# Altium PCB TempeMax.PcbDoc
Units mil, origin at the board's own origin, x right, y up, seen from the top; angles counter-clockwise.
Board outline 2770 x 2630 mil, 3 copper layers (Top Layer, Mid-Layer 1, Bottom Layer); 85 components, 63 nets, 284 pads, 170 vias.
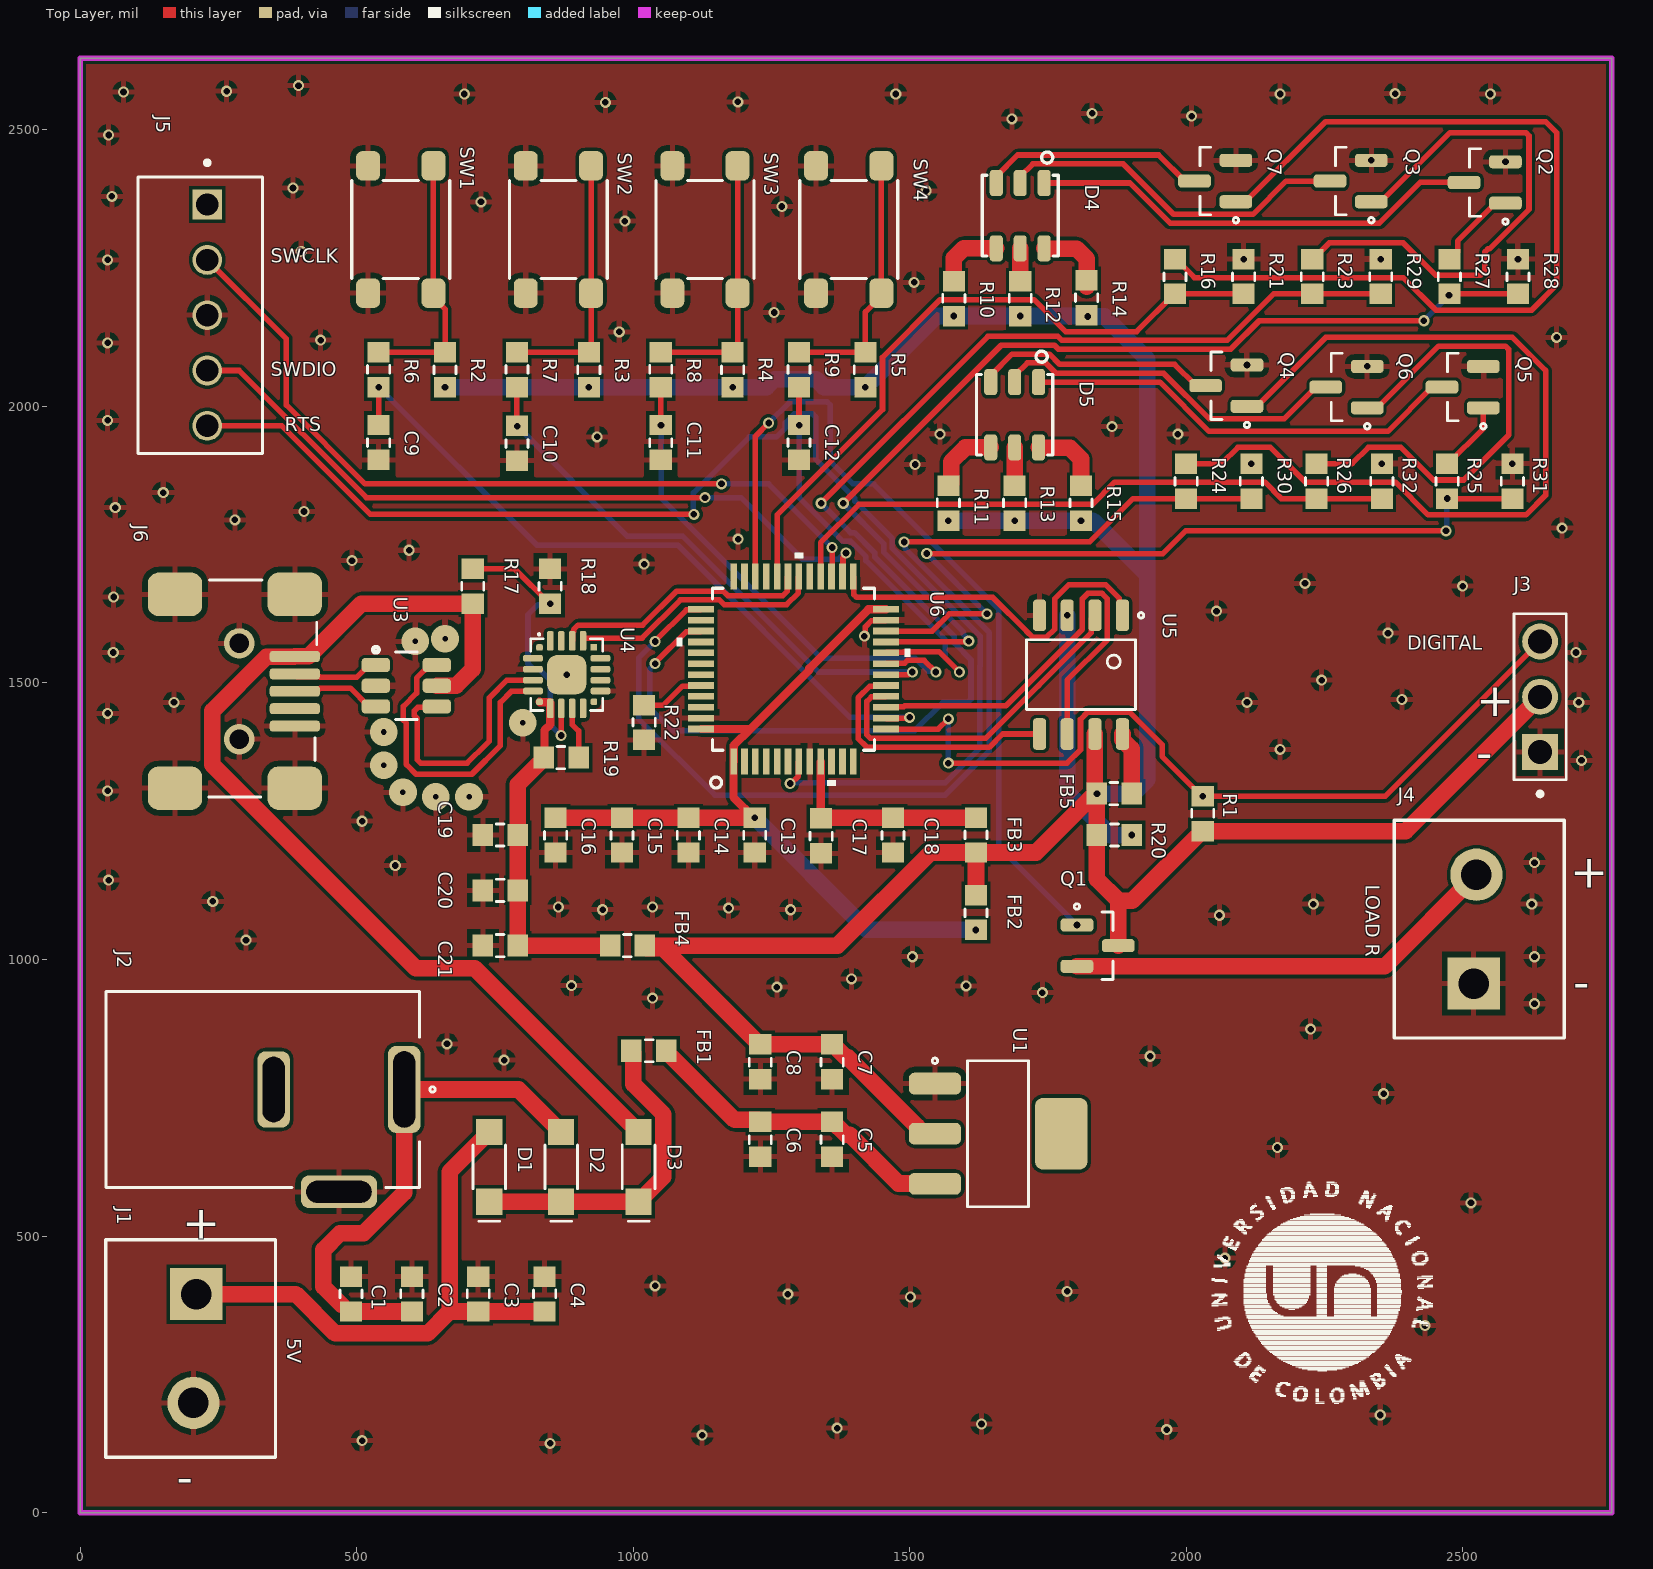
[diagram p0: Top Layer view]
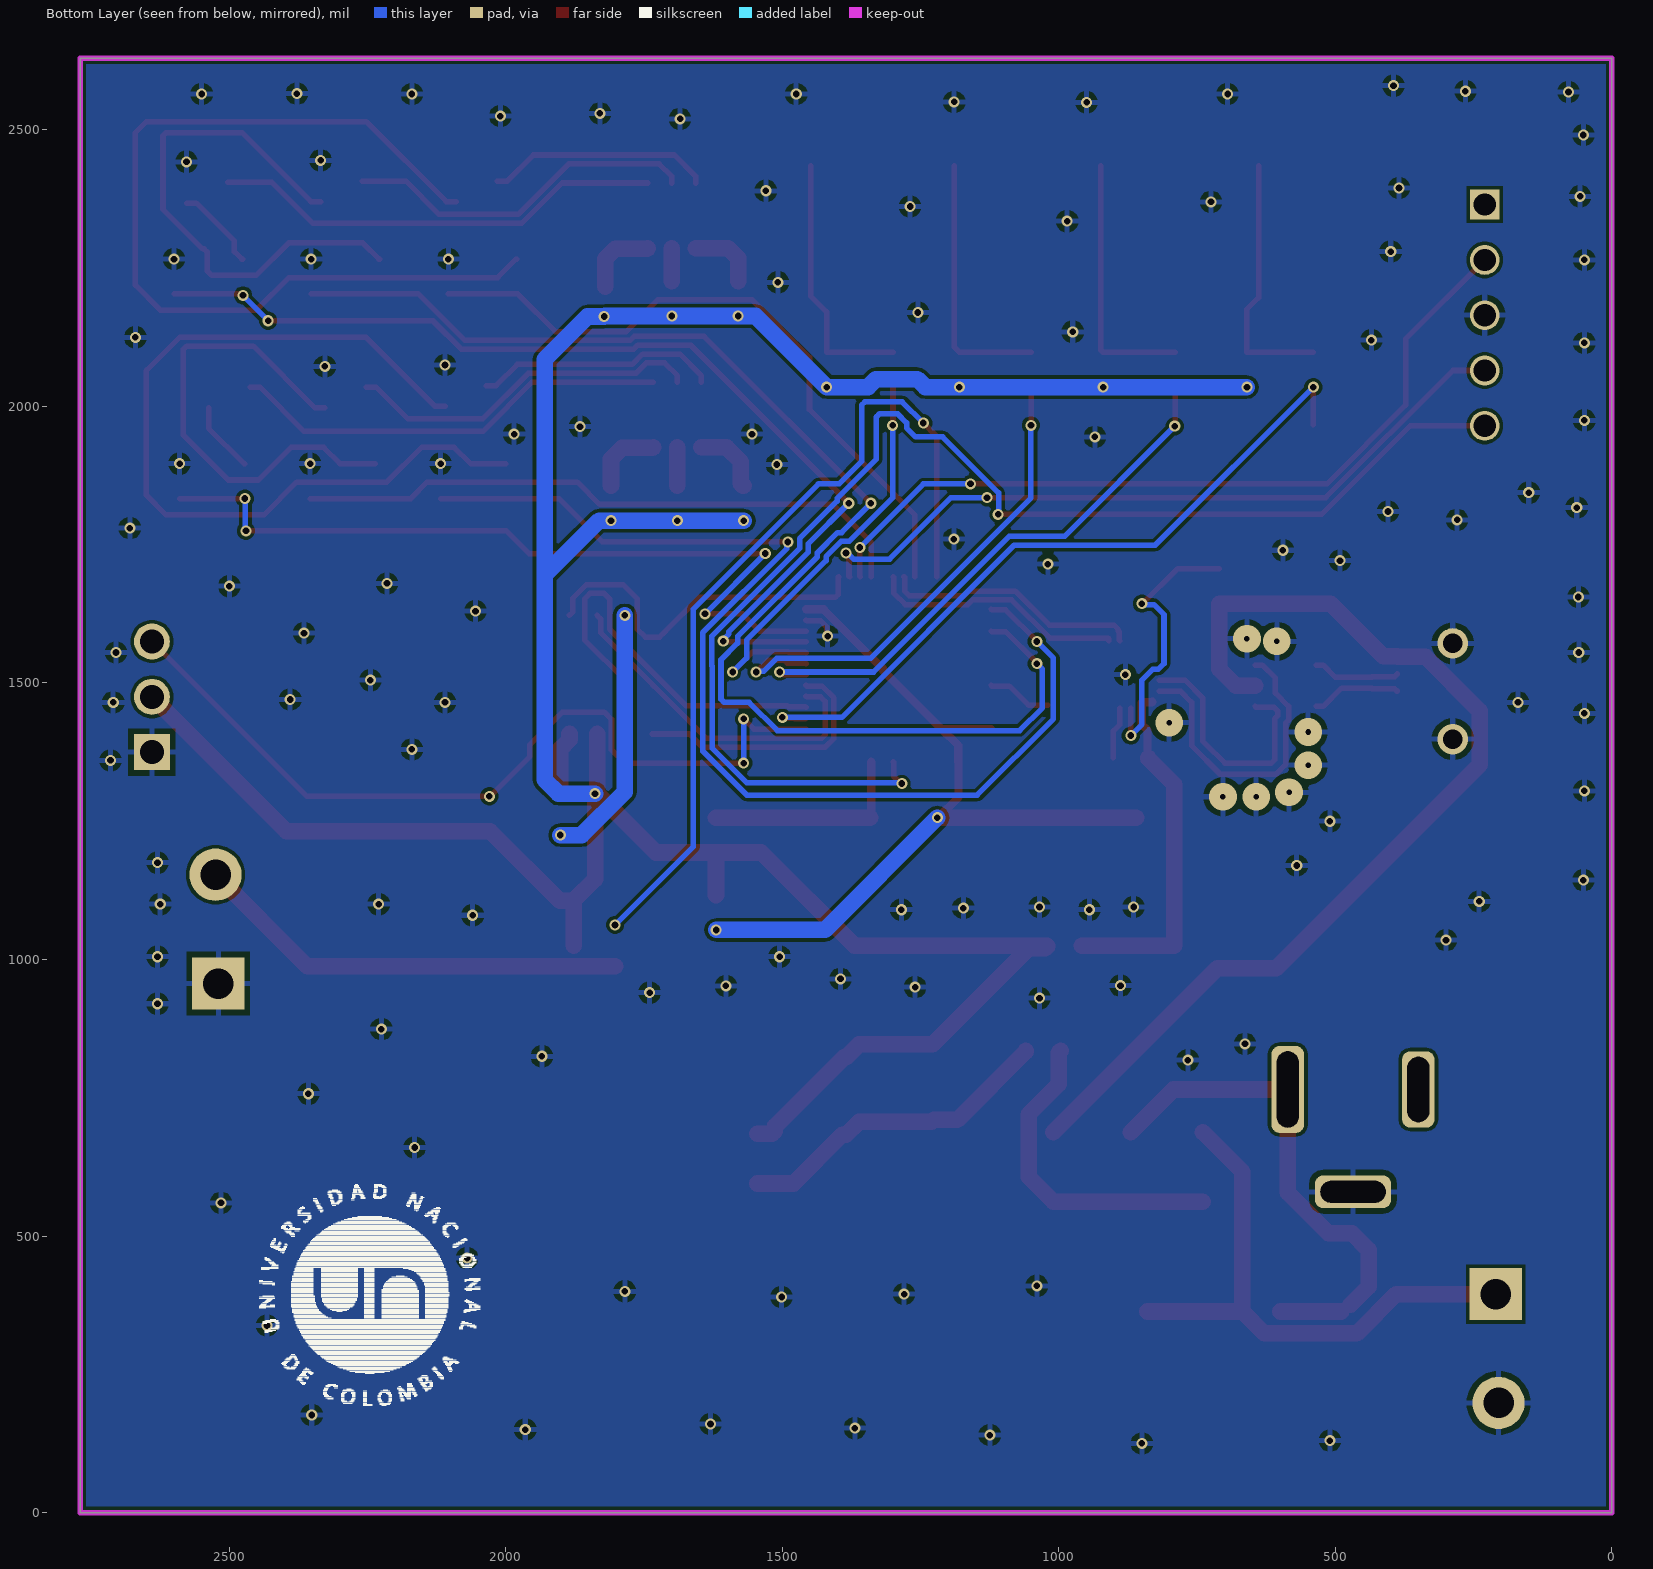
[diagram p1: Bottom Layer view, seen from below]
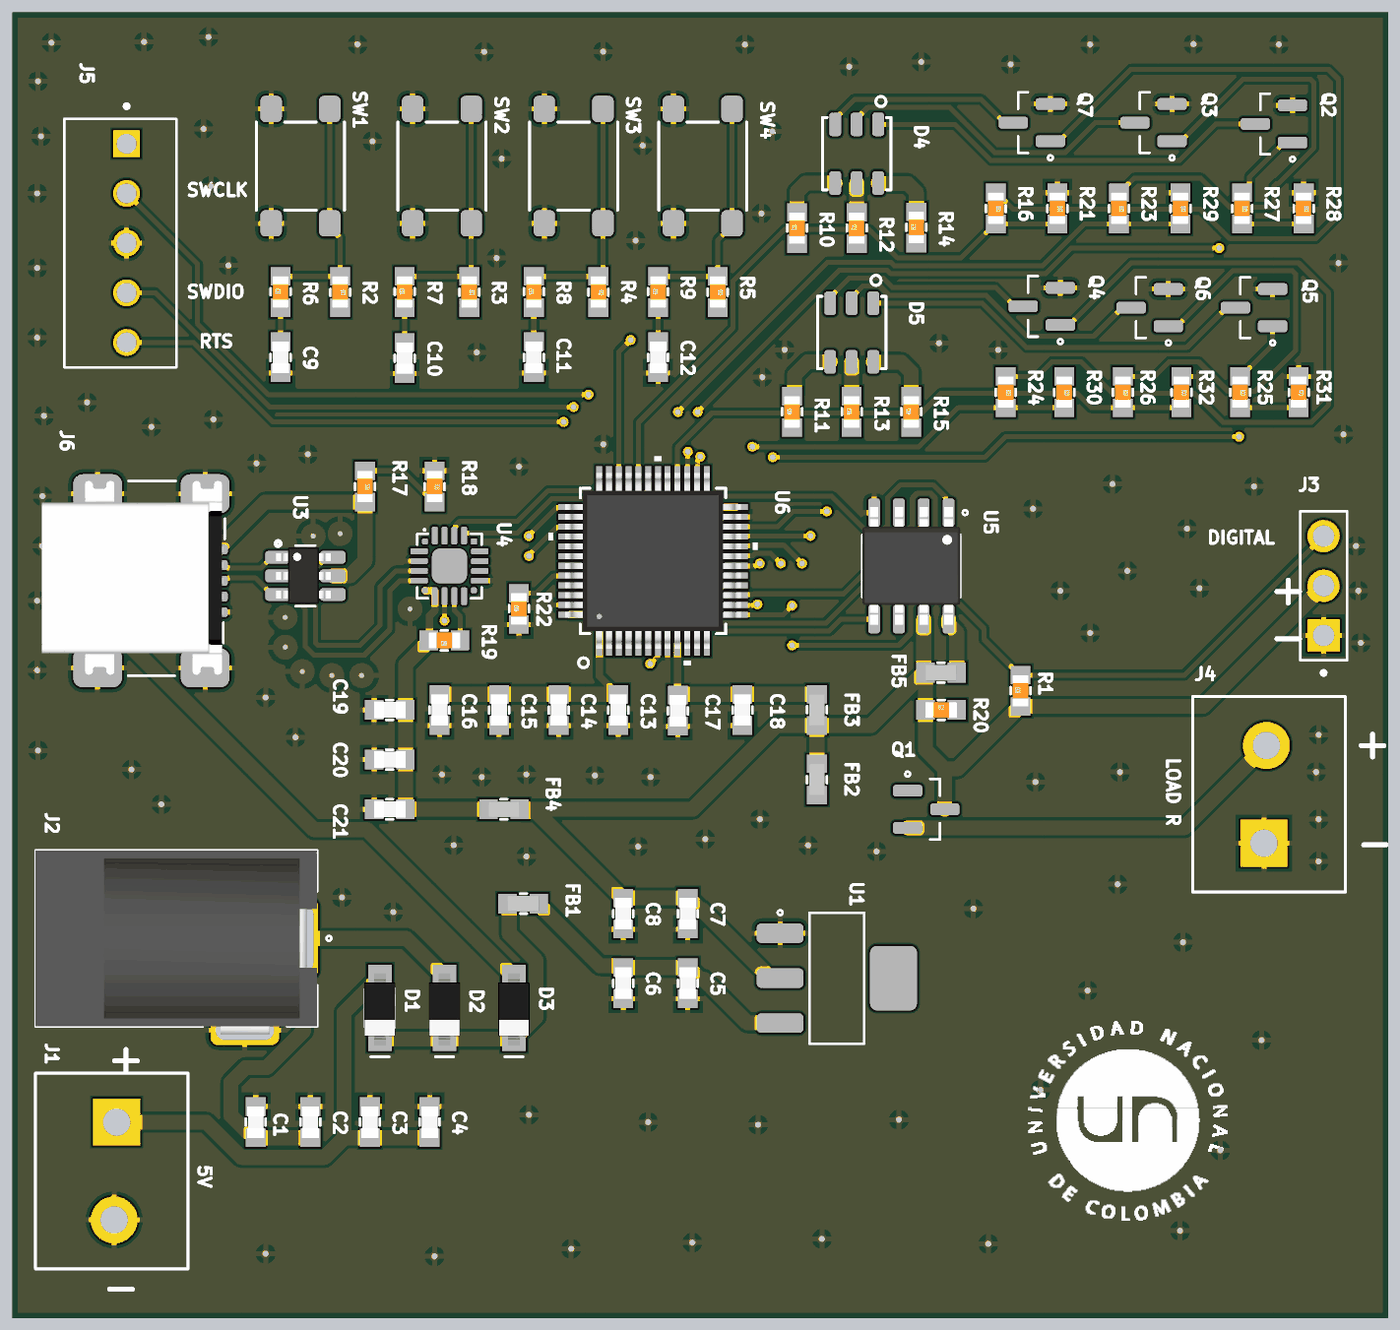
[diagram p2: 3D render of the assembled board from above, using the file's embedded part models]

## Layer stack, top to bottom
Top Solder: solder mask 0.4, Solder Resist, Dk 3.5
Top Layer: signal copper 1.4
Dielectric 1: dielectric 12.6, FR-4, Dk 4.8
Mid-Layer 1: signal copper 1.4
Dielectric2: dielectric 12.6, FR-4, Dk 4.8
Bottom Layer: signal copper 1.4
Bottom Solder: solder mask 0.4, Solder Resist, Dk 3.5

## Board outline
0,0 0,2630 2770,2630 2770,0

## Design rules (kind name [scope] priority, off if disabled: settings)
Clearance [All] p1: gap=6 ignorepadtopadclearanceinfootprint=FALSE except(0: Arc-Hole Track-Hole SMDPad-Hole THPad-Hole Via-Hole Fill-Hole Poly-Hole Region-Hole Text-Hole; 10: Arc-Text Track-Text SMDPad-Text THPad-Text Via-Text Fill-Text Poly-Text Region-Text Text-Text)
DiffPairsRouting [All] p1: maxlimit=10 minlimit=10 mostfreqgap=10 toplayer_minwidth=10 toplayer_maxwidth=10 toplayer_prefwidth=10 midlayer1_minwidth=10 midlayer1_maxwidth=10 midlayer1_prefwidth=10 bottomlayer_minwidth=10 bottomlayer_maxwidth=10 bottomlayer_prefwidth=10 maxuncoupledlength=500
HoleSize [All] p1: absolutevalues=TRUE maxlimit=150 minlimit=1 maxpercent=80.000 minpercent=20.000
HoleToHoleClearance [All] p1: gap=6 allowstackedmicrovias=TRUE
MatchedLengths [InDifferentialPairClass('All Differential Pairs')] p1: tolerance=1000 checknetsindiffpair=TRUE checkdiffpairvsdiffpair=FALSE checkxsignals=FALSE checkothers=FALSE
MinimumAnnularRing [All] p1: minimumring=4
MinimumSolderMaskSliver [All] p1: minsoldermaskwidth=1
PolygonConnect [All] p1: connectstyle=Relief reliefconductorwidth=10 reliefentries=4 polygonreliefangle="90 Angle" airgapwidth=10
RoutingVias [All] p1: holewidth=20 width=30 viastyle="Through Hole" minholewidth=12 minwidth=20 maxholewidth=28 maxwidth=50
SilkToSilkClearance [All] p1: silktosilkclearance=3
SilkToSolderMaskClearance [IsPad] p1: minsilkscreentomaskgap=1 clearancetoexposedcopper=TRUE
SolderMaskExpansion [All] p1: expansion=4 istentingtop=FALSE
Width [All] p1: maxlimit=30 minlimit=10 preferedwidth=15
24 further rules are at their usual default settings.

## Classes and differential pairs
component class U_200_MCU: C13 C14 C15 C16 C17 C18 FB2 FB3 J5 R22 U6
component class U_100_UART_FLASH: C19 C20 C21 FB4 FB5 J6 R17 R18 R19 R20 U3 U4 U5
component class U_000_Power_and_Loads: C1 C2 C3 C4 C5 C6 C7 C8 C9 C10 C11 C12 D1 D2 D3 D4 D5 FB1 J1 J2 J3 J4 Q1 Q2 Q3 Q4 Q5 Q6 Q7 R1 R2 R3 R4 R5 R6 R7 R8 R9 R10 R11 R12 R13 R14 R15 R16 R21 R23 R24 R25 R26 R27 R28 R29 R30 R31 R32 SW1 SW2 SW3 SW4 U1
differential pair D2: +D2_P -D2_N
differential pair D1: +D1_P -D1_N

## Components (designator, comment, footprint, x,y, rotation, side; value= is the part's Value field where it differs from the comment)
C1 "10uF 10V" 0603_cap 490,395 r90 top value=10uF
C2 "0.1uF 50V" 0603_cap 600,395 r90 top value=0.1uF
C3 "10uF 10V" 0603_cap 720,395 r90 top value=10uF
C4 "0.1uF 50V" 0603_cap 840,395 r90 top value=0.1uF
C5 "10uF 10V" 0603_cap 1360,675 r270 top value=10uF
C6 "0.1uF 50V" 0603_cap 1230,675 r270 top value=0.1uF
C7 "10uF 10V" 0603_cap 1360,815 r270 top value=10uF
C8 "0.1uF 50V" 0603_cap 1230,815 r270 top value=0.1uF
C9 "0.1uF 50V" 0603_cap 540,1935 r270 top value=0.1uF
C10 "0.1uF 50V" 0603_cap 790,1933.5 r270 top value=0.1uF
C11 "0.1uF 50V" 0603_cap 1050,1935 r270 top value=0.1uF
C12 "0.1uF 50V" 0603_cap 1300,1935 r270 top value=0.1uF
C13 "22uF 6V3" 0603_cap 1220,1225 r270 top value=22uF
C14 "0.1uF 50V" 0603_cap 1100,1225 r270 top value=0.1uF
C15 "0.1uF 50V" 0603_cap 980,1225 r270 top value=0.1uF
C16 "0.1uF 50V" 0603_cap 860,1225 r270 top value=0.1uF
C17 "22uF 6V3" 0603_cap 1340,1223.5 r270 top value=22uF
C18 "0.1uF 50V" 0603_cap 1470,1225 r270 top value=0.1uF
C19 "10uF 10V" 0603_cap 760,1225 r180 top value=10uF
C20 "0.1uF 50V" 0603_cap 760,1125 r180 top value=0.1uF
C21 "0.1uF 50V" 0603_cap 760,1025 r180 top value=0.1uF
D1 "40V 1A" SOD_123 740,625 r90 top
D2 "40V 1A" SOD_123 870,625 r90 top
D3 "40V 1A" SOD_123 1010,625 r90 top
D4 "RGB" RGB_NS_3.5X3.7 1700,2345 r270 top
D5 "RGB" RGB_NS_3.5X3.7 1690,1985 r270 top
FB1 "60OHM 2A" 0603_fb 1028.5,835 r0 top value="60 OHM"
FB2 "60OHM 2A" 0603_fb 1620,1085 r270 top value="60 OHM"
FB3 "60OHM 2A" 0603_fb 1620,1225 r90 top value="60 OHM"
FB4 "60OHM 2A" 0603_fb 990,1025 r180 top value="60 OHM"
FB5 "60OHM 2A" 0603_fb 1870,1300 r180 top value="60 OHM"
J1 "Connector 2pos" CON_2x1_TH_5MM 200,296.57 r270 top
J2 "PWR JACK 2.1mm" CON_POWER_BARREL_2.1MM_3CONN 468.11,765 r270 top
J3 "77311-4AC-03LF" AMPHENOL_77311-4AC-03LF 2640,1475 r90 top
J4 "Connector 2pos" CON_2x1_TH_5MM 2530,1055 r90 top
J5 "640456-5" TE_640456-5 230,2365 r90 top
J6 "USB Mini B" CON_5x1_SMD_miniUSB_B 280,1485 r270 top
Q1 "N CH" SOT_23_3 1840,1025 r0 top
Q2 "N CH" SOT_23_3 2540,2405 r180 top
Q3 "N CH" SOT_23_3 2297.5,2407.6 r180 top
Q4 "N CH" SOT_23_3 2072.6,2037.6 r180 top
Q5 "N CH" SOT_23_3 2500,2035 r180 top
Q6 "N CH" SOT_23_3 2290,2035 r180 top
Q7 "N CH" SOT_23_3 2052.6,2407.6 r180 top
R1 "4.7k 1/10W" 0603_res 2030,1263.5 r90 top value=4.7k
R2 "1k 1/10W" 0603_res 660,2066.5 r270 top value=1k
R3 "1k 1/10W" 0603_res 920,2066.5 r270 top value=1k
R4 "1k 1/10W" 0603_res 1180,2066.5 r270 top value=1k
R5 "1k 1/10W" 0603_res 1420,2066.5 r270 top value=1k
R6 "1k 1/10W" 0603_res 540,2066.5 r90 top value=1k
R7 "1k 1/10W" 0603_res 790,2066.5 r90 top value=1k
R8 "1k 1/10W" 0603_res 1050,2066.5 r90 top value=1k
R9 "1k 1/10W" 0603_res 1300,2066.5 r90 top value=1k
R10 "330R 1/10W" 0603_res 1580,2195 r90 top value=330R
R11 "330R 1/10W" 0603_res 1570,1825 r90 top value=330R
R12 "330R 1/10W" 0603_res 1700,2195 r90 top value=330R
R13 "330R 1/10W" 0603_res 1690,1825 r90 top value=330R
R14 "280R 1/10W" 0603_res 1820,2196.5 r90 top value=280R
R15 "280R 1/10W" 0603_res 1810,1825 r90 top value=280R
R16 "10k 1/10W" 0603_res 1980,2235 r270 top value=10k
R17 "3k3 1/10W" 0603_res 710,1675 r270 top value=3k3
R18 "10k 1/10W" 0603_res 850,1675 r270 top value=10k
R19 "10k 1/10W" 0603_res 870,1365 r180 top value=10k
R20 "10k 1/10W" 0603_res 1870,1225 r0 top value=10k
R21 "10k 1/10W" 0603_res 2104,2235 r270 top value=10k
R22 "10k 1/10W" 0603_res 1020,1428.5 r90 top value=10k
R23 "10k 1/10W" 0603_res 2228,2235 r270 top value=10k
R24 "10k 1/10W" 0603_res 2000,1865 r270 top value=10k
R25 "10k 1/10W" 0603_res 2472,1865 r270 top value=10k
R26 "10k 1/10W" 0603_res 2236,1865 r270 top value=10k
R27 "10k 1/10W" 0603_res 2476,2235 r270 top value=10k
R28 "10k 1/10W" 0603_res 2600,2235 r270 top value=10k
R29 "10k 1/10W" 0603_res 2352,2235 r270 top value=10k
R30 "10k 1/10W" 0603_res 2118,1865 r270 top value=10k
R31 "10k 1/10W" 0603_res 2590,1865 r270 top value=10k
R32 "10k 1/10W" 0603_res 2354,1865 r270 top value=10k
SW1 "Sw" Sw_PUSH_4.5x4.5x5mm 580,2320 r90 top
SW2 "Sw" Sw_PUSH_4.5x4.5x5mm 865,2320 r90 top
SW3 "Sw" Sw_PUSH_4.5x4.5x5mm 1130,2320 r90 top
SW4 "Sw" Sw_PUSH_4.5x4.5x5mm 1390,2320 r90 top
U1 "AMS1117-ADJ" SOT_223 1660,685 r0 top
U3 "USBLC6-2SC6" SOT_23_6 590,1495 r0 top
U4 "CP2102N-A02-GQFN20R" WFQFN_20_EP_3X3MM 880,1515 r0 top
U5 "ZD25WQ16BTIGR" SOIC_8_3.9mm 1810,1515 r270 top
U6 "STM32F030C8T6TR" LQFP48_7x7mm 1290,1525 r90 top

## Footprints (in the part's own frame and the unit in brackets; to place one, negate y for a bottom-side part, rotate by r counter-clockwise, add the part's x,y. Pads: shape width x height; smd on the part's side, far side on the other; paste and mask are expansions set on the pad)
0603_cap [mil]
  rect 37x40 smd: 1(-31.5,0) 2(31.5,0)
  silkscreen extent -7,-20 8,20, body extent -31,-17 31,17, height 34
0603_fb [mil]
  rect 37x40 smd: 1(-31.5,0) 2(31.5,0)
  silkscreen extent -6,-20 8,20, body extent -32,-16 31,16, height 32
0603_res [mil] "1608 Metric / 20190225 / C-A.Serna.A"
  rect 37x40 smd: 1(-31.5,0) 2(31.5,0)
  silkscreen extent -7,-20 8,20, body extent -31,-16 32,16, height 12
AMPHENOL_77311-4AC-03LF [mm]
  rect 1.65x1.65 / inner round 1.65 / far side rect 1.65x1.65 hole 1.1: 01(-2.54,0)
  round 1.65 hole 1.1: 02(0,0) 03(2.54,0)
  silkscreen extent -4.56,-1.2 3.81,1.2
CON_2x1_TH_5MM [mm]
  rect 2.4x2.4 hole 1.4: 1(-2.5,0.254)
  round 2.4 hole 1.4: 2(2.5,0.127)
  silkscreen extent -5,-3.9 5,3.9, body extent -5,-3.9 5,3.9, height 10.2
CON_5x1_SMD_miniUSB_B [mm] "20190328 / V-A.Patino"
  rrect50% 2x2.5 smd: 0(-4.45,2.75) 0(-4.45,-2.75) 0(4.45,2.75) 0(4.45,-2.75)
  round 1.4 hole 0.889: 0(-2.2,0.2) 0(2.2,0.2)
  rrect50% 0.5x2.3 smd: 1(-1.6,2.75) 2(-0.8,2.75) 3(0,2.75) 4(0.8,2.75) 5(1.6,2.75)
  silkscreen extent -5.11,-1.2 4.85,3.76, body extent -5.1,-5.6 4.8,3.65, height 4
CON_POWER_BARREL_2.1MM_3CONN [mm]
  rrect50% 4x1.5 hole 1.016 slot 3.5 at 0 deg: 1(0,3)
  rrect50% 3.5x1.5 hole 1.016 slot 3 at 0 deg: 2(0,-3)
  rrect50% 1.5x3.5 hole 1.016 slot 3 at 90 deg: 3(4.7,0)
  silkscreen extent -4.5,-10.7 4.5,4.43, body extent -4.5,-10.7 4.9,3.7, height 11
LQFP48_7x7mm [mil]
  rect 47x12 smd paste+0: 1(-167.32,108.27) 2(-167.32,88.58) 3(-167.32,68.9) 4(-167.32,49.21) 5(-167.32,29.53) 6(-167.32,9.84) 7(-167.32,-9.84) 8(-167.32,-29.53) 9(-167.32,-49.21) 10(-167.32,-68.9) 11(-167.32,-88.58) 12(-167.32,-108.27) 25(167.32,-108.27) 26(167.32,-88.58) 27(167.32,-68.9) 28(167.32,-49.21) 29(167.32,-29.53) 30(167.32,-9.84) 31(167.32,9.84) 32(167.32,29.53) 33(167.32,49.21) 34(167.32,68.9) 35(167.32,88.58) 36(167.32,108.27)
  rect 12x47 smd paste+0: 13(-108.27,-167.32) 14(-88.58,-167.32) 15(-68.9,-167.32) 16(-49.21,-167.32) 17(-29.53,-167.32) 18(-9.84,-167.32) 19(9.84,-167.32) 20(29.53,-167.32) 21(49.21,-167.32) 22(68.9,-167.32) 23(88.58,-167.32) 24(108.27,-167.32) 37(108.27,167.32) 38(88.58,167.32) 39(68.9,167.32) 40(49.21,167.32) 41(29.53,167.32) 42(9.84,167.32) 43(-9.84,167.32) 44(-29.53,167.32) 45(-49.21,167.32) 46(-68.9,167.32) 47(-88.58,167.32) 48(-108.27,167.32)
  silkscreen extent -215,-211 211,211, body extent -177,-177 177,177, height 63
RGB_NS_3.5X3.7 [mm] "20220901/V-A.Patino"
  rrect50% 1.2x0.6 smd: 1(-1.5,1.1) 2(-1.5,0) 3(-1.5,-1.1) 4(1.5,-1.1) 5(1.5,0) 6(1.5,1.1)
  silkscreen extent -2.92,-1.75 1.85,1.75, body extent -1.85,-1.74 1.85,1.75, height 1
SOD_123 [mm] "/ 20191030 / V-A.Patino"
  rect 1.2x1.2 smd: 1(-1.6,0) 2(1.6,0)
  silkscreen extent -2.5,-0.75 1,0.75, body extent -1.93,-0.8 1.77,0.8, height 1.28
SOIC_8_3.9mm [mm]
  rrect50% 1.45x0.6 smd: 1(-2.725,1.905) 2(-2.725,0.635) 3(-2.725,-0.635) 4(-2.725,-1.905) 5(2.725,-1.905) 6(2.725,-0.635) 7(2.725,0.635) 8(2.725,1.905)
  silkscreen extent -2.85,-2.5 1.6,2.88, body extent -3.01,-2.5 3.01,2.5, height 1.73
SOT_23_3 [mm] "TO-236-3, SC-59/ 20220901 / V-A.Patino"
  rrect50% 1.5x0.6 smd: 1(-0.95,0.95) 2(-0.95,-0.95) 3(0.95,0)
  silkscreen extent -1.07,-1.55 0.7,1.92, body extent -0.7,-1.52 0.7,1.53, height 1.12
SOT_23_6 [mm] "/ 20190225 / V-A.Patino"
  rrect50% 1.3x0.65 smd: 1(-1.4,0.95) 2(-1.4,0) 3(-1.4,-0.95) 4(1.4,-0.95) 5(1.4,0) 6(1.4,0.95)
  silkscreen extent -1.52,-1.55 0.5,1.78, body extent -1.5,-1.45 1.3,1.45, height 1.45
SOT_223 [mm] "TO-261-4, TO-261AA / 20220901/ V-A.Patino"
  rrect50% 2.4x1 smd: 1(-2.9,2.3) 2(-2.9,0) 3(-2.9,-2.3)
  rrect30% 2.4x3.3 smd: 4(2.9,0)
  silkscreen extent -3.02,-3.35 1.4,3.47, body extent -1.86,-3.35 1.86,3.35, height 1.8
Sw_PUSH_4.5x4.5x5mm [mm]
  rrect50% 1.35x1.1 smd: 1(-2.925,1.5) 1(2.925,1.5) 2(-2.925,-1.5) 2(2.925,-1.5)
  silkscreen extent -2.25,-2.25 2.25,2.25, body extent -2.25,-2.25 2.25,2.25, height 5
TE_640456-5 [mm]
  rect 1.37x1.37 hole 1.02: 1(0,0)
  round 1.37 hole 1.02: 2(-2.54,0) 3(-5.08,0) 4(-7.62,0) 5(-10.16,0)
  silkscreen extent -11.43,-2.54 2.02,3.18
WFQFN_20_EP_3X3MM [mm] "QFN_20/ 20210809/ V-A.Patino"
  rrect50% 0.3x0.3 smd: 1(-1.25,1.25) 6(-1.25,-1.25) 11(1.25,-1.25)
  rrect50% 0.9x0.3 smd: 2(-1.55,0.75) 3(-1.55,0.25) 4(-1.55,-0.25) 5(-1.55,-0.75) 12(1.55,-0.75) 13(1.55,-0.25) 14(1.55,0.25) 15(1.55,0.75)
  rrect50% 0.3x0.9 smd: 7(-0.75,-1.55) 8(-0.25,-1.55) 9(0.25,-1.55) 10(0.75,-1.55) 17(0.75,1.55) 18(0.25,1.55) 19(-0.25,1.55) 20(-0.75,1.55)
  rect 0.3x0.3 smd: 16(1.25,1.25)
  rrect50% 1.8x1.8 smd: 21(0,0)
  silkscreen extent -1.65,-1.65 1.65,1.9, body extent -1.5,-1.5 1.5,1.5, height 0.8

## Part data
C1 C3 C5 C7 C19: library part Cap_10uF_0603_10V, "10V 10uF X5R ±10% 0603 Multilayer Ceramic Capacitors MLCC - SMD/SMT ROHS", Manufacturer=CCTC, Manufacturer Part Number=TCC0603X5R106K100CT, Supplier Part Number 1=C380314, ComponentLink1Description=LCSC, ComponentLink1URL=https://www.lcsc.com/product-detail/Multilayer-Ceramic-Capacitors-MLCC-SMD-SMT_CCTC-TCC0603X5R106K100CT_C380314.html, Supplier 1=LCSC
C2 C4 C6 C8 C9 C10 C11 C12 C14 C15 C16 C18 C20 C21: library part Cap_0.1uF_0603_50V, "50V 100nF Y5V -20%~+80% 0603 Multilayer Ceramic Capacitors MLCC - SMD/SMT ROHS", Manufacturer="Walsin Tech Corp", Manufacturer Part Number=0603F104Z500CT, Supplier Part Number 1=C83060, ComponentLink1Description=LCSC, ComponentLink1URL=https://www.lcsc.com/product-detail/Multilayer-Ceramic-Capacitors-MLCC-SMD-SMT_Walsin-Tech-Corp-0603F104Z500CT_C83060.html, Supplier 1=LCSC
  C9 C10 C11 C12: Usage=NM
C13 C17: library part Cap_22uF_0805_6V3, "6.3V 22uF X5R ±20% 0805 Multilayer Ceramic Capacitors MLCC - SMD/SMT ROHS", Manufacturer="Samsung Electro-Mechanics", Manufacturer Part Number=CL21A226MQQNNNE, Supplier Part Number 1=C5674, ComponentLink1Description=LCSC, ComponentLink1URL=https://www.lcsc.com/product-detail/Multilayer-Ceramic-Capacitors-MLCC-SMD-SMT_Samsung-Electro-Mechanics-CL21A226MQQNNNE_C5674.html, Supplier 1=LCSC
D1 D2 D3: library part D_Schottky_40V_1A_SOD_123F, "DIODE SCHOTTKY 40V 1A SOD123F", Manufacturer="Shanghai Prisemi Elec", Manufacturer Part Number=PSBD1DF40V1H, Supplier Part Number 1=C110730, ComponentLink1Description=LCSC, ComponentLink1URL=https://www.lcsc.com/product-detail/Switching-Diode_Shanghai-Prisemi-Elec-PSBD1DF40V1H_C110730.html, Supplier 1=LCSC
D4 D5: library part LED_RGB_3535_SMD, "-30℃~+85℃ RGB 110° 3535(mm) Light Emitting Diodes (LED) ROHS", Manufacturer="Foshan NationStar Optoelectronics", Manufacturer Part Number=RS-3535MWAM, Supplier Part Number 1=C842778, ComponentLink1Description=LCSC, ComponentLink1URL=https://www.lcsc.com/product-detail/Light-Emitting-Diodes-LED_Foshan-NationStar-Optoelectronics-RS-3535MWAM_C842778.html, Supplier 1=LCSC
FB1 FB2 FB3 FB4 FB5: library part FB_60_0603_2A, "2A 1 100mΩ 60Ω@100MHz ±25% 0603 Ferrite Beads ROHS", Manufacturer=TAI-TECH, Manufacturer Part Number=HCB1608KF-600T20, Supplier Part Number 1=C369516, ComponentLink1Description=LCSC, ComponentLink1URL=https://www.lcsc.com/product-detail/Ferrite-Beads_TAI-TECH-HCB1608KF-600T20_C369516.html, Supplier 1=LCSC
J1 J4: library part Con_2x1_TH_5mm, "2POS 5MM", Manufacturer=JILN, Manufacturer Part Number=JL126-50002G01, Supplier Part Number 1=C394556, ComponentLink1Description=Digi-Key, ComponentLink1URL=https://www.lcsc.com/product-detail/Screw-terminal_JILN-JL126-50002G01_C394556.html, Supplier 1=LCSC
J2: library part Con_Power_Jack_2.1mm_3pins, "CONN PWR JACK 2X5.5MM SOLDER", Manufacturer=HCTL, Manufacturer Part Number=HC-DC-005-2.0T, Supplier Part Number 1=C3010533, ComponentLink1Description=LCSC, ComponentLink1URL=https://www.lcsc.com/product-detail/AC-DC-Power-Connectors_HCTL-HC-DC-005-2-0T_C3010533.html, Supplier 1=LCSC
J3: "Connector Header Through Hole 3 position 0.100\" (2.54mm)", Manufacturer="Amphenol ICC (FCI)", Supplier Part Number=77311-4AC-03LF-ND, ComponentLink1Description=Digi-Key, ComponentLink1URL=https://www.digikey.com/en/products/detail/amphenol-icc-fci/77311-4AC-03LF/4404912, Manufacturer Part Number=77311-4AC-03LF, Supplier 1=Digi-Key
J5: "Header, Friction Lock; MTA-100; 5; 250 VAC; Polyester; Tin; Copper Alloy; Tin", Package=None, Centerline_Pitch="2.54 mm[.1 in]", Digi-Key_Part_Number=A19471-ND, Digi-Key_Purchase_URL=https://www.digikey.com/product-detail/en/te-connectivity-amp-connectors/640456-5/A19471-ND/259011?utm_source=snapeda&utm_medium=aggregator&utm_campaign=symbol, EU_RoHS_Compliance=Compliant, MF="TE Connectivity", MP=640456-5, Number_of_Positions=5, Product_Type=Connector, SnapEDA_Link=https://www.snapeda.com/parts/640456-5/TE%20Connectivity%20AMP%20Connectors/view-part/381420/?ref=snap, TE_purchase_URL=https://www.te.com/usa-en/product-640456-5.html?te_bu=Cor&te_type=disp&te_campaign=seda_glo_cor-seda-global-disp-prtnr-fy19-seda-model-bom-cta_sma-317_1&elqCampaignId=32493
J6: library part Con_Mini_USB_B, "CONN RCPT USB2.0 MINI B SMD R/A", Manufacturer="EDAC Inc.", Manufacturer Part Number=KH-MINI-SMT-5P-Cu, Supplier Part Number 1=C2688795, ComponentLink1Description=LCSC, ComponentLink1URL=https://datasheet.lcsc.com/lcsc/2106070035_Shenzhen-Kinghelm-Elec-KH-MINI-SMT-5P-Cu_C2688795.pdf, Supplier 1=LCSC
Q1 Q2 Q3 Q4 Q5 Q6 Q7: library part Q_NFET_20V_3.2A_SOT23, "MOSFET N-CH 20V SOT23", Manufacturer=Doeshare, Manufacturer Part Number=DN2302S, Supplier Part Number 1=C2931750, ComponentLink1Description=LCSC, ComponentLink1URL=https://www.lcsc.com/product-detail/MOSFETs_Doeshare-DN2302S_C2931750.html, Supplier 1=LCSC
R1: library part Res_10k_0603_1/10W, "RES SMD 4.7k OHM 5% 1/10W 0603", Manufacturer=FOJAN, Manufacturer Part Number=FRC0603J103TS, Supplier Part Number 1=C2930027, ComponentLink1Description=LCSC, ComponentLink1URL=https://www.lcsc.com/product-detail/Chip-Resistor-Surface-Mount_FOJAN-FRC0603J103TS_C2930027.html, Supplier 1=LCSC
R2 R3 R4 R5 R6 R7 R8 R9: library part Res_1k_0603_1/10W, "RES SMD 1k OHM 5% 1/10W 0603", Manufacturer=FOJAN, Manufacturer Part Number="FRC0603J102 TS", Supplier Part Number 1=C2907113, ComponentLink1Description=LCSC, ComponentLink1URL=https://www.lcsc.com/product-detail/Chip-Resistor-Surface-Mount_FOJAN-FRC0603J102-TS_C2907113.html, Supplier 1=LCSC
R10 R11 R12 R13: library part Res_330R_0603_1/10W, "RES SMD 330R OHM 5% 1/10W 0603", Manufacturer=FOJAN, Manufacturer Part Number="FRC0603J331 TS", Supplier Part Number 1=C2907152, ComponentLink1Description=LCSC, ComponentLink1URL=https://www.lcsc.com/product-detail/Chip-Resistor-Surface-Mount_FOJAN-FRC0603J331-TS_C2907152.html, Supplier 1=LCSC
R14 R15: library part Res_330R_0603_1/10W, "RES SMD 280R OHM 5% 1/10W 0603", Manufacturer=FOJAN, Manufacturer Part Number="FRC0603J331 TS", Supplier Part Number 1=C2907152, ComponentLink1Description=LCSC, ComponentLink1URL=https://www.lcsc.com/product-detail/Chip-Resistor-Surface-Mount_FOJAN-FRC0603J331-TS_C2907152.html, Supplier 1=LCSC
R16 R18 R19 R20 R21 R22 R23 R24 R25 R26 R27 R28 R29 R30 R31 R32: library part Res_10k_0603_1/10W, "RES SMD 10k OHM 5% 1/10W 0603", Manufacturer=FOJAN, Manufacturer Part Number=FRC0603J103TS, Supplier Part Number 1=C2930027, ComponentLink1Description=LCSC, ComponentLink1URL=https://www.lcsc.com/product-detail/Chip-Resistor-Surface-Mount_FOJAN-FRC0603J103TS_C2930027.html, Supplier 1=LCSC
R17: library part Res_3k3_0603_1/10W, "RES SMD 3k3 OHM 5% 1/10W 0603", Manufacturer=FOJAN, Manufacturer Part Number="FRC0603J332 TS", Supplier Part Number 1=C2907140, ComponentLink1Description=LCSC, ComponentLink1URL=https://www.lcsc.com/product-detail/Chip-Resistor-Surface-Mount_FOJAN-FRC0603J332-TS_C2907140.html, Supplier 1=LCSC
SW1 SW2 SW3 SW4: library part Sw_PUSH_4.5x4.5x5.0xmm, "SWITCH TACTILE SPST-NO 0.05A 12V", Manufacturer=BZCN, Manufacturer Part Number=TSC015A05026A, Supplier Part Number 1=C2888509, ComponentLink1Description=LCSC, ComponentLink1URL=https://www.lcsc.com/product-detail/Tactile-Switches_BZCN-TSC015A05026A_C2888509.html, Last modified by=N-A.Potosi, Last modified date=20190222, Supplier 1=LCSC
U1: library part LDO_3V3_1A, "1A 70dB@(120Hz) 5mA 1.2V@1A Adjustable 1.2V~20V Positive 1 20V Output Adjustable SOT-223-3L Linear Voltage Regulators (LDO) ROHS", Manufacturer="WPMtek(Wei Pan Microelectronics)", Supplier Part Number=C2688238, ComponentLink1Description=LCSC, ComponentLink1URL=https://www.lcsc.com/product-detail/Linear-Voltage-Regulators-LDO_WPMtek-Wei-Pan-Microelectronics-AMS1117-ADJ_C2688238.html, Manufacturer Part Number=AMS1117-ADJ, Supplier=LCSC
U3: library part TVS_5.25V_2CH_SOT_23_6, "TVS DIODE 5.25V 17V SOT23-6", Manufacturer=STMicroelectronics, Supplier Part Number 1=C7519, ComponentLink1Description=LCSC, ComponentLink1URL=https://www.lcsc.com/product-detail/ESD-Protection-Devices_STMicroelectronics-USBLC6-2SC6_C7519.html, Manufacturer Part Number=USBLC6-2SC6, Supplier 1=LCSC
U4: library part IC_SGL_USB2UART-BRIDGE_20QFN, "IC USB TO UART BRIDGE QFN20", Manufacturer="Silicon Labs", Supplier Part Number 1=C969913, ComponentLink1Description=LCSC, ComponentLink1URL=https://www.lcsc.com/product-detail/USB-ICs_SILICON-LABS-CP2102N-A02-GQFN20R_C969913.html, Manufacturer Part Number=CP2102N-A02-GQFN20R, Supplier 1=LCSC
U5: library part IC_FLASH_ZD25WQ16BTIGR_8SOP, "IC FLASH 16M SPI 85MHZ 8SOP", Manufacturer=Zetta, Supplier Part Number 1=C2896790, ComponentLink1Description=LCSC, ComponentLink1URL=https://www.lcsc.com/product-detail/NOR-FLASH_Zetta-ZD25WQ16BTIGR_C2896790.html, Manufacturer Part Number=ZD25WQ16BTIGR, Supplier 1=LCSC
U6: library part IC_STM32F030C8T6TR_LQFP48_7x7MM, "IC MCU 32BIT 64KB FLASH 48LQFP", Manufacturer=STMicroelectronics, Supplier Part Number 1=C23922, ComponentLink1Description=LCSC, ComponentLink1URL=https://www.lcsc.com/product-detail/ST-Microelectronics_STMicroelectronics-STM32F030C8T6_C23922.html, Manufacturer Part Number=STM32F030C8T6TR, Supplier 1=LCSC

## Via types
v1: diameter 20, hole 12, Top Layer to Bottom Layer, tented both sides, 102 vias
v2: diameter 20, hole 12, Top Layer to Bottom Layer, 60 vias
v3: diameter 50/50/50 (per signal layer), hole 10, Top Layer to Bottom Layer, tented both sides, 8 vias

## Nets (pads, with @x,y where several pads share a name; then routed paths per layer and width w, separated by ;. In a path a pad name is that pad's centre, name@x,y a point inside that pad or via, vN(x,y) a via of type N, cw(c..) or ccw(c..) an arc to the next point about the centre after c; other vN are vias at no path point)
3V3: C7.1 C8.1 FB2.1 FB3.1 FB4.1 FB5.2 J3.02 Q1.3 R1.1 R2.2 R3.2 R4.2 R5.2 R10.1 R11.1 R12.1 R13.1 R14.1 R15.1 R20.1 U1.2 U5.7 | length 5623.6
  Top Layer w30: U1.2 1518.27,685 1513.58,689.69 1513.58,698.12 1388.7,823 1385,823 1361.5,846.5 C7.1 C8.1 1228.5,846.5 1055,1020 1025,1020 1021.5,1023.5 FB4.1 1369.7,1025 1538.2,1193.5 FB3.1 ; FB2.1 FB3.1 ; U5.7 FB5.2@1835,1300 ; FB5.2@1836.92,1298.08 v2(1838.84,1300) ; Q1.3 1877.4,1106.39 ; J3.02 2397,1232 R1.1 2028.5,1232 1902.89,1106.39 1877.4,1106.39 ; FB3.1 1728.5,1193.5 FB5.2@1835,1300 ; FB5.2@1835,1300 1838.5,1296.5 R20.1 1838.5,1145.3 1877.4,1106.39
  Bottom Layer w30: v2(660,2035) 1241.53,2035 1255.88,2049.36 1330.76,2049.36 1345.12,2035 v2(1420,2035) 1548.5,2163.5 v2(1580,2163.5) 1821.5,2163.5 v2(1822.43,2162.57) 1852.43,2162.57 1930,2085 1930,1695 ; v2(1570,1793.5) v2(1690,1793.5) v2(1810,1793.5) 1831.5,1793.5 1930,1695 ; v2(1838.84,1300) 1905,1300 1930,1325 1930,1695
  other v2: 920,2035 1180,2035 1700,2163.5
D1_N: J6.2 U3.1 | length 158
  Top Layer w10: J6.2 393.11,1511.65 433.5,1511.65 434.4,1510.75 500.43,1510.75 522.09,1532.4 U3.1
D1_P: J6.3 U3.3 | length 162.7
  Top Layer w10: J6.3 393.11,1489.84 433.5,1489.84 434.4,1490.75 488.94,1490.75 522.09,1457.6 U3.3
D2_N: U3.6 U4.5 | length 558.9
  Top Layer w10: U3.6 632.32,1532.4 608.53,1508.61 608.53,1481.67 584.53,1457.67 584.53,1432.82 590,1427.34 590,1352.57 607.57,1335 608.79,1335 701.21,1335 708.28,1335 760,1386.72 760,1390 760,1434.14 760,1465 780,1485 U4.5@818.98,1485
D2_P: U3.4 U4.4 | length 454.2
  Top Layer w10: U3.4 643.38,1455.86 611,1455.86 608.79,1453.64 604.53,1449.38 604.53,1441.1 608.79,1436.84 610,1435.63 610,1360.86 615.86,1355 700,1355 735,1390 740,1395 740,1434.14 740,1465 740,1473.28 771.72,1505 U4.4@818.98,1505
G_Heater: Q1.1 U6.34 | length 1564.4
  Top Layer w10: U6.34 1221.1,1946.1 v2(1245,1970)
  Bottom Layer w10: v2(1245,1970) 1283.45,2008.45 1350.86,2008.45 1356.72,2002.6 1356.72,1900.61 1397.33,1860 1434.7,1860 1661,1633.7 1661,1204 v2(1802.6,1062.4)
GND: C1.2 C2.2 C3.2 C4.2 C5.2 C6.2 C7.2 C8.2 C9.2 C10.2 C11.2 C12.2 C13.2 C14.2 C15.2 C16.2 C17.2 C18.2 C19.2 C20.2 C21.2 J1.2 J2.3 J3.01 J4.1 J5.3 J6.0 J6.5 Q2.2 Q3.2 Q4.2 Q5.2 Q6.2 Q7.2 R18.1 R21.1 R22.1 R28.1 R29.1 R30.1 R31.1 R32.1 SW1.1 SW2.1 SW3.1 SW4.1 U1.1 U3.2 U4.3 U4.12 U4.21 U5.4 U6.8 U6.23 U6.47 | length 60.1
  Top Layer w10: v2(1418.16,1584.61) 1420.08,1586.53 1420.08,1601.71 1430.95,1612.58 1456.32,1612.58 U6.23
  other v1: 850,125 510,130 1125,140 1965,150 1369.02,152.49 1630,160 2351.04,176.44 2431.88,338.12 1501.44,389.8 1280,395 1785,400 1040,410 2070,460 2515,560 2165,660 2357.03,757.27 766.95,817.95 1935,825 663.61,847.47 2225.3,874.04 2630,920 1035,930 1740,940 1260,950 1602.15,952.29 888.75,952.67 1395,965 1505,1005 2630,1005 300,1035 2060,1080 945,1090 1285,1090 1172.86,1092.97 865,1095 1035,1095 2230,1100 2625,1100 240,1105 51.68,1143.49 570,1170 2630,1175 510,1250 50,1305 2715,1360 2170,1380 50,1445 170,1465 2110,1465 2710,1465 2390,1470 2245,1505 60,1555 2705,1555 2365,1590 2055,1630 60.66,1655.46 2500,1675 2215,1680 1020,1715 491.79,1721.33 595,1740 1190,1760 2680,1780 280,1795 405,1810 63.65,1817.14 150.48,1844.09 1510,1895 935,1945 1555,1950 1985,1950 1865.95,1963.5 50,1975 50,2115 435,2120 2670,2125 975,2135 1255,2170 1508.22,2224.46 50,2265 400,2280 985,2335 1269.09,2361.52 725,2370 57.66,2380 1530,2390 385,2395 51.68,2490.78 1685,2520 2010,2525 1830,2530 950,2550 1189.39,2550.66 695,2565 1475,2565 2170,2565 2550,2565 2377.99,2565.63 78.62,2568.63 265,2570 395,2580
  other v2: 880,1515 2118,1896.5 2354,1896.5 2590,1896.5 2327.4,2072.4 2110,2075 2104,2266.5 2352,2266.5 2600,2266.5 2577.4,2442.4 2334.9,2445
  other v3: 643.36,1294.29 703.36,1294.29 583.88,1302.23 549.45,1351.36 549.29,1411.36 800.71,1428.31 605.83,1575.17 660,1580
LEDB1: D4.1 Q2.3 | length 819.9
  Top Layer w10: D4.1 1898.32,2404.06 1970.99,2331.39 2349.53,2331.39 2423.14,2405 Q2.3
LEDB2: D5.1 Q5.3 | length 799.3
  Top Layer w10: D5.1 1952.68,2044.06 2041.73,1955 2364.88,1955 2444.88,2035 Q5.3
LEDG1: D4.2 Q3.3 | length 644.1
  Top Layer w10: D4.2 1700,2415.87 1722.81,2438.68 1886.32,2438.68 1977.61,2347.39 2120.62,2347.39 2180.84,2407.6 Q3.3
LEDG2: D5.2 Q6.3 | length 649.7
  Top Layer w10: D5.2 1690,2055.87 1712.81,2078.68 1746.22,2078.68 1764.84,2060.06 1959.3,2060.06 2041.97,1977.39 2177.27,1977.39 2234.88,2035 Q6.3
LEDR1: D4.3 Q7.3 | length 405.9
  Top Layer w10: D4.3 1656.69,2415.87 1695.5,2454.68 1950.4,2454.68 1997.48,2407.6 Q7.3
LEDR2: D5.3 Q4.3 | length 440
  Top Layer w10: D5.3 1646.69,2055.87 1685.5,2094.68 1752.84,2094.68 1771.46,2076.06 1979.02,2076.06 2017.48,2037.6 Q4.3
NetC5_1: C5.1 C6.1 FB1.2 U1.3 | length 586.3
  Top Layer w30: FB1.2 1060,833.5 1183.5,710 1226.5,710 C6.1 C5.1 1361.5,706.5 1385,683 1392,683 1480,595 1545.28,595 U1.3
NetD4_4: D4.4 R10.2 | length 125.8
  Top Layer w30: R10.2 1580,2268.37 1597.57,2285.94 D4.4
NetD4_5: D4.5 R12.2 | length 59.4
  Top Layer w30: R12.2 D4.5
NetD4_6: D4.6 R14.2 | length 135.3
  Top Layer w30: D4.6 1744.25,2285 1802.43,2285 1820,2267.43 R14.2 R14.2@1820,2216.5
NetD5_4: D5.4 R11.2 | length 128.9
  Top Layer w30: R11.2 1571.5,1856.5 1575,1860 1575,1900 1600.94,1925.94 D5.4
NetD5_5: D5.5 R13.2 | length 69.4
  Top Layer w30: R13.2 D5.5
NetD5_6: D5.6 R15.2 | length 133.9
  Top Layer w30: D5.6 1734.25,1925 1790,1925 1810,1905 R15.2
NetFB5_1: FB5.1 U5.8 | length 114.6
  Top Layer w30: U5.8 1885,1397.36 1901.5,1380.86 FB5.1
NetJ4_2: J4.2 Q1.2 | length 791.1
  Top Layer w30: Q1.2 2359.17,987.6 J4.2
NetQ2_1: Q2.1 R27.1 | length 154.4
  Top Layer w10: R27.1 2477.5,2266.5 2491,2280 2491,2298.91 2559.68,2367.6 Q2.1
NetQ3_1: Q3.1 R23.1 | length 970.1
  Top Layer w10: R23.1 2229.5,2266.5 2259,2296 2392.44,2296 2451.44,2237 2532,2237 2540,2245 2540,2279.14 2545.86,2285 2548.56,2285 2620,2356.44 2620,2489.14 2614.14,2495 2477.42,2495 2352.62,2370.2 Q3.1
NetQ4_1: Q4.1 R24.1 | length 1569.5
  Top Layer w10: R24.1 2063.94,1896.5 2093.44,1926 2152.44,1926 2215.44,1863 2378.56,1863 2437.56,1804 2614.56,1804 2650,1839.44 2650,2065 2590,2125 2252.52,2125 2127.72,2000.2 Q4.1
NetQ5_1: Q5.1 R25.1 | length 129.1
  Top Layer w10: R25.1 2473.5,1896.5 2537.4,1960.4 Q5.1
NetQ6_1: Q6.1 R26.1 | length 877
  Top Layer w10: R26.1 2299.94,1896.5 2329.44,1926 2388.44,1926 2447.44,1867 2502,1867 2583.37,1948.37 2583.37,2103.14 2577.51,2109 2456.52,2109 2345.12,1997.6 Q6.1
NetQ7_1: Q7.1 R16.1 | length 1671
  Top Layer w10: R16.1 1981.5,2266.5 2015,2233 2392.44,2233 2451.44,2174 2624.56,2174 2670,2219.44 2670,2495 2650,2515 2252.52,2515 2107.72,2370.2 Q7.1
NetR2_1: R2.1 R6.2 SW1.2 | length 465.8
  Top Layer w10: R6.2 R2.1 660,2175.82 639.06,2196.77 639.06,2204.84 SW1.2@639.06,2435.16
NetR3_1: R3.1 R7.2 SW2.2 | length 468.8
  Top Layer w10: R7.2 R3.1 924.06,2102.06 924.06,2204.84 SW2.2@924.06,2435.16
NetR4_1: R4.1 R8.2 SW3.2 | length 470.9
  Top Layer w10: R8.2 R4.1 1189.06,2107.06 1189.06,2204.84 SW3.2@1189.06,2435.16
NetR5_1: R5.1 R9.2 SW4.2 | length 469.2
  Top Layer w10: R9.2 R5.1 1420,2170.8 1449.06,2199.85 1449.06,2204.84 SW4.2@1449.06,2435.16
NetR19_1: R19.1 U4.9 | length 93.8
  Top Layer w10: U4.9 889.84,1424.86 901.5,1413.2 R19.1
NetR20_2: R20.2 U5.3 | length 468.1
  Bottom Layer w30: v2(1785,1622.28) 1785,1302.93 1862.93,1225 v2(1901.5,1225)
NetR22_2: R22.2 U6.44 | length 117.4
  Top Layer w10: R22.2 1055,1460 1089.47,1494.47 1121.68,1494.47 U6.44
P_LEDB1: R27.2 R28.2 U6.21 | length 1874.9
  Top Layer w10: v2(1380,1825) 1665.68,2110.68 1761.62,2110.68 1768.8,2103.5 2080.68,2103.5 2132.18,2155 v2(2430,2155) ; U6.21 1458.05,1574.94 1606.27,1574.94 v2(1607,1575.67) ; R27.2 R28.2
  Bottom Layer w10: v2(1380,1825) 1453,1752 1453,1736.75 1596.85,1592.9 1596.85,1588.53 1607,1578.38 v2(1607,1575.67) ; v2(2430,2155) 2430,2155.27 2475.32,2200.59 v2(2475.32,2200.86)
P_LEDB2: R25.2 R31.2 U6.22 | length 1483
  Top Layer w10: U6.22 1541.01,1593.9 1572.11,1625 v2(1640,1625) ; v2(1531,1734) 1958.15,1734 1999.15,1775 v2(2470,1775) ; v2(2472,1833.5) R31.2
  Bottom Layer w10: v2(1531,1734) v2(1640,1625) ; v2(2470,1775) 2471,1776 2471,1832.5 v2(2472,1833.5)
P_LEDG1: R23.2 R29.2 U6.39 | length 2459.1
  Top Layer w10: v2(1040,1535) 1040,1536.59 1096.31,1592.9 1121.68,1592.9 U6.39 ; v2(1340,1825) 1641.68,2126.68 1768.25,2126.68 1775.43,2119.5 2074.06,2119.5 2158.06,2203.5 R23.2 R29.2
  Bottom Layer w10: v2(1040,1535) 1030,1525 1030,1455 1071,1414 1509,1414 1560,1465 1605.14,1465 1611,1470.86 1611,1541.98 1580.85,1572.13 1580.85,1584.15 1437,1728 1437,1735.33 1400.33,1772 1393,1772 v2(1340,1825)
P_LEDG2: R26.2 R32.2 U6.28 | length 1134
  Top Layer w10: U6.28 1339.21,1732.15 1339,1732.37 1339,1753.7 1408.3,1823 1830.56,1823 1870.56,1863 2142.56,1863 2172.06,1833.5 R26.2 R32.2
P_LEDR1: R16.2 R21.2 U6.32 | length 1223.4
  Top Layer w10: U6.32 1261,1692.85 1261,1804.45 1451,1994.45 1451,2088.56 1555.44,2193 1724.56,2193 1782.06,2135.5 1910.5,2135.5 1978.5,2203.5 R16.2 R21.2
P_LEDR2: R24.2 R30.2 U6.37 | length 2086.4
  Top Layer w10: v2(1040,1575) 1040,1575.96 1096.31,1632.27 1121.68,1632.27 U6.37 ; v2(1490,1755) 1825.56,1755 1904.06,1833.5 R24.2 R30.2
  Bottom Layer w10: v2(1040,1575) 1010,1545 1010,1435 1147.82,1297.18 1564.5,1297.18 1644,1376.67 1644,1591 1491.91,1743.09 1491.91,1753.09 v2(1490,1755)
P_Touch1: C9.1 R6.1 U6.14 | length 1319.9
  Top Layer w10: C9.1 v2(540,2035) ; U6.14 1458.32,1435.42 1477.82,1435.42 1478.22,1435.82 1498.09,1435.82 v2(1500,1437.73)
  Bottom Layer w10: v2(540,2035) 826,1749 1081,1749 1392.27,1437.73 v2(1500,1437.73)
P_Touch2: C10.1 R7.1 U6.18 | length 1017.9
  Top Layer w10: C10.1 R7.1 ; U6.18 1497.45,1515.16 1502.14,1519.85 v2(1504.85,1519.85)
  Bottom Layer w10: v2(790.55,1964.27) 989.82,1765 1090,1765 1335.15,1519.85 v2(1504.85,1519.85)
P_Touch3: C11.1 R8.1 U6.19 | length 928.3
  Top Layer w10: C11.1 R8.1 ; U6.19 1458.32,1535.84 1491.14,1535.84 1496.15,1540.85 1526.42,1540.85 v2(1547.42,1519.85)
  Bottom Layer w10: v2(1050.55,1965.77) 1050.55,1834.45 1340,1545 1510,1545 1533.61,1521.39 1545.88,1521.39 v2(1547.42,1519.85)
P_Touch4: C12.1 R9.1 U6.20 | length 791.7
  Top Layer w10: C12.1 R9.1 ; U6.20 1458.32,1555.53 1488.2,1555.53 1489.52,1556.85 1553,1556.85 v2(1590,1519.85)
  Bottom Layer w10: v2(1300.55,1965.77) 1300.55,1834.76 1379.3,1756 1393.7,1756 1421,1728.7 1421,1721.37 1564.85,1577.52 1564.85,1545 v2(1590,1519.85)
RST: J5.5 U6.7 | length 2412.5
  Top Layer w10: J5.5 365.05,1965 525.05,1805 v2(1110,1805) ; v2(1284,1318.18) 1285.71,1318.18 1298.84,1331.31 1298.84,1356.68 U6.7
  Bottom Layer w10: v2(1110,1805) 1109,1806 1109,1843.7 1210.3,1945 1259.14,1945 1275.49,1961.35 1275.49,1970.42 1291.85,1986.77 1324.14,1986.77 1330,1980.92 1330,1904.7 1401,1833.7 1401,1829 1469,1761 1469,1743.37 1628,1584.37 1628,1531 1627,1530 1627,1382.3 1564.7,1320 1285.82,1320 v2(1284,1318.18)
RX_MCU: U4.18 U6.31 | length 470.8
  Top Layer w10: U4.18 890.75,1576.93 890.75,1591.75 892.62,1593.62 892.62,1596.57 900.8,1604.74 1017.41,1604.74 1078.94,1666.27 1162.73,1666.27 1171.18,1657.82 1271.03,1657.82 1279.16,1665.95 1279.16,1691.32 U6.31
"SEN DS18B20": J3.03 R1.2 U6.13 | length 1532.4
  Top Layer w10: U6.13 1551.73,1416.73 v2(1570,1435) ; v2(1570,1355) 1784.73,1355 1809,1379.27 1809,1434.17 1822.09,1447.26 1897.91,1447.26 1956.45,1388.71 1956.45,1367.05 2028.5,1295 2360,1295 J3.03
  Bottom Layer w10: v2(1570,1355) v2(1570,1435)
  other v2: 2030,1295
SPI_MISO: U5.2 U6.16 | length 620.5
  Top Layer w10: U6.16 1456.32,1474.79 1430.95,1474.79 1422.82,1466.66 1422.82,1406.18 1429.27,1399.73 1637.53,1399.73 1733.14,1495.34 1828.75,1590.95 1828.75,1616.03 U5.2
SPI_MOSI: U5.5 U6.17 | length 478.1
  Top Layer w10: U6.17 1456.32,1494.47 1428.01,1494.47 1406.82,1473.29 1406.82,1399.55 1422.64,1383.73 1644.15,1383.73 1668.14,1407.72 U5.5
SPI_NSS: U5.1 U6.25 | length 659.9
  Top Layer w10: U6.25 1399.27,1691.32 1399.27,1659.86 1404.13,1655 1650,1655 1712.19,1592.81 1712.19,1592.64 1722.09,1582.74 1747.91,1582.74 1762.19,1597.02 1762.19,1651.92 1788.09,1677.83 1854.54,1677.83 1878.75,1653.61 1878.75,1628.54 U5.1
SPI_SCK: U5.6 U6.15 | length 796.3
  Top Layer w10: U6.15 1458.32,1457.1 1489.67,1457.1 1491.3,1458.73 1673.9,1458.73 1812.19,1597.02 1812.19,1651.92 1822.09,1661.83 1847.91,1661.83 1857.81,1651.92 1857.81,1577.96 1785,1505.15 U5.6
SWCLK: J5.2 U6.27 | length 1468.6
  Top Layer w10: J5.2 372.94,2122.06 372.94,2002.36 515.3,1860 v2(1160,1860) ; U6.27 1359.9,1693.32 1359.9,1719.9 1360,1720 v2(1360,1745)
  Bottom Layer w10: v2(1160,1860) 1245,1860 v2(1360,1745)
SWDIO: J5.4 U6.26 | length 1346.1
  Top Layer w10: J5.4 287.67,2065 517.67,1835 v2(1130,1835) ; U6.26 1379.58,1693.32 1379.58,1726.88 1385,1732.29 v2(1385,1735)
  Bottom Layer w10: v2(1130,1835) 1195.2,1835 1306.2,1724 1371.29,1724 1382.29,1735 v2(1385,1735)
TX_MCU: U4.17 U6.30 | length 464.5
  Top Layer w10: U4.17 909.53,1580.21 910.43,1581.12 1016.42,1581.12 1085.57,1650.27 1156.1,1650.27 1164.55,1641.82 1277.66,1641.82 1298.84,1663.01 1298.84,1691.32 U6.30
VBUS: D3.2 J6.1 R17.2 U3.5 | length 1890.1
  Top Layer w30: U3.5 680.01,1495.01 710,1525 R17.2 508.89,1643.5 413.39,1547.99 J6.1 387.61,1547.34 337.18,1547.34 239.32,1449.48 239.32,1352.01 607.32,984 713.99,984 D3.2
VBUS_CP21: R17.1 R18.2 U4.8 | length 512.6
  Top Layer w10: R17.1 785.5,1706.5 848.5,1643.5 v2(850,1643.5) ; v2(870,1405) 870.08,1405.08 870.08,1453.9 U4.8
  Bottom Layer w10: v2(850,1643.5) 848.09,1641.59 828.09,1641.59 810,1623.5 810,1535 820,1525 830,1525 850,1505 850,1425 v2(870,1405)
VDD_CP: C19.1 C20.1 C21.1 FB4.2 R19.2 U4.6 U4.7 | length 650.8
  Top Layer w15: U4.6 831.69,1464.88 849.57,1464.88 850.47,1463.98 U4.7 850.47,1425.17 840,1414.7 840,1366.5 R19.2
  Top Layer w30: R19.2 838.5,1363.5 791.5,1316.5 C19.1 C20.1 C21.1 FB4.2
VDD_MCU: C13.1 C14.1 C15.1 C16.1 FB2.2 U6.1 U6.24 U6.48 | length 1458.1
  Top Layer w15: U6.48 1211.88,1416.73 ; C13.1@1218.5,1256.5 1181.73,1293.27 U6.1 1181.92,1357.86 1181.92,1386.77 1211.88,1416.73 ; U6.24 1457.14,1633.08 1425.29,1633.08 1318.58,1526.38 1318.58,1523.44 1211.88,1416.73
  Top Layer w30: C16.1 C15.1 C14.1 1218.5,1256.5 1218.58,1256.42 v2(1219.92,1256.42)
  Bottom Layer w30: v2(1219.92,1256.42) 1422.92,1053.42 v2(1619.92,1053.42)
VDDA_MCU: C17.1 C18.1 FB3.2 U6.9 | length 383.6
  Top Layer w10: C17.1@1339.21,1255.79 C17.1 C17.1@1341.5,1256.5
  Top Layer w15: C17.1@1339.21,1255.79 U6.9
  Top Layer w30: C17.1@1341.5,1256.5 C18.1 FB3.2
VIN: D1.1 D2.1 D3.1 FB1.1 | length 585.3
  Top Layer w30: D1.1 D2.1 D3.1 1054.62,606.63 1054.62,720.31 1000.5,774.43 1000.5,831.5 FB1.1
VIN_BORNER: C3.1 C4.1 D1.2 J1.1 | length 1030
  Top Layer w30: J1.1 390.3,395 461.3,324 628.7,324 668.2,363.5 ; D1.2 668.2,616.19 668.2,363.5 ; C4.1 C3.1 668.2,363.5
VIN_JACK: C1.1 C2.1 D2.2 J2.1 | length 914.1
  Top Layer w30: C1.1@472.69,375.61 440,408.3 440,475 470,505 512.62,505 586.22,578.6 J2.1 792.99,765 D2.2 ; C1.1 C2.1
pads on no net: J2.2 J5.1 J6.4 U1.4 U4.1 U4.2 U4.10 U4.11 U4.13 U4.14 U4.15 U4.16 U4.19 U4.20 U6.2 U6.3 U6.4 U6.5 U6.6 U6.10 U6.11 U6.12 U6.29 U6.33 U6.35 U6.36 U6.38 U6.40 U6.41 U6.42 U6.43 U6.45 U6.46

## Polygon pours and split planes (outlines as drawn)
GND on Top Layer "GND_L01_P000" (solid, pour order 0): 0,0 2770,0 2770,2630 0,2630
GND on Bottom Layer "GND_L03_P001" (solid, pour order 1): 0,0 0,2630 2770,2630 2770,0

## Keep-outs
Keep-Out Layer:
  the board outline again, w10

## Silkscreen, mask and mechanical layers (free items; w line width, h text height)
Top Overlay:
  drawing of 844 lines, arcs and shapes, not listed
  text "SWCLK" at 345,2260 h25
  text "SWDIO" at 345,2055 h25
  text "RTS" at 370,1955 h25
  text "DIGITAL" at 2400,1560 h25
  text "+" at 2525,1440 h60
  text "-" at 2525,1345.01 h60
  text "LOAD R" at 2325,1135 h25 r270
  text "+" at 2695,1130 h60
  text "-" at 2700,930.01 h60
  text "+" at 185,495 h60
  text "5V" at 375,315 h25 r270
  text "-" at 175,35.01 h60
Bottom Overlay:
  drawing of 844 lines, arcs and shapes, not listed